# Altium PCB PPG_Proto_1.0.pcbdoc (part 2 of 2)
Units mil, origin at the board's own origin, x right, y up, seen from the top; angles counter-clockwise.
Board outline 5468.87 x 9475.06 mil, 2 copper layers (Top Layer, Bottom Layer); 64 components, 100 nets, 316 pads, 85 vias.
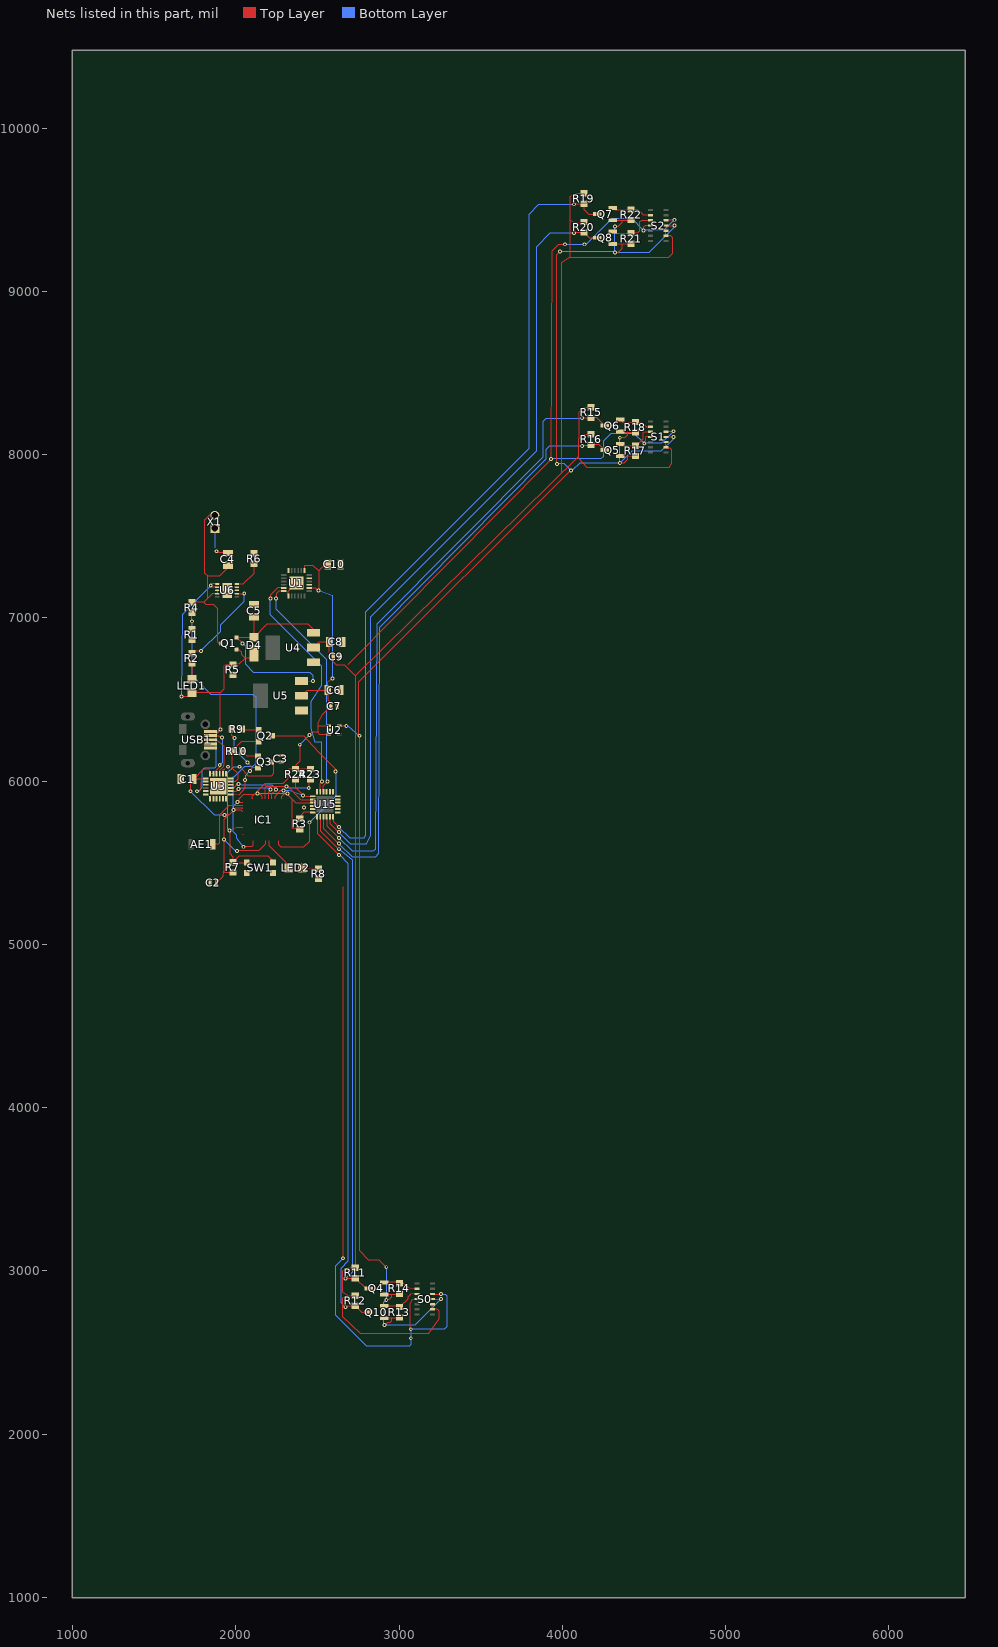
[diagram p2: the nets of this part, all layers, seen from the top]

## Via types
v1: diameter 24, hole 12, Top Layer to Bottom Layer, 85 vias

## Nets (pads, with @x,y where several pads share a name; then routed paths per layer and width w, separated by ;. In a path a pad name is that pad's centre, name@x,y a point inside that pad or via, vN(x,y) a via of type N, cw(c..) or ccw(c..) an arc to the next point about the centre after c; other vN are vias at no path point)
+1.8V: Q4.1 Q5.1 Q6.1 Q7.1 Q8.1 Q10.1 R13.2 R14.2 R17.2 R18.2 R21.2 R22.2 S0.11 S1.11 S2.11 U2.5 | length 10851
  Top Layer w5: U2.5@2634,6339.06 2676,6339.06 v1(2677,6338.06) v1@2687,6338.06 ; Q10.1@2909.24,2710.66 2996.1,2710.66 R13.2@3002,2716.57 ; Q4.1@2909.24,2855.66 2996.1,2855.66 R14.2@3002,2861.57 ; v1(2912,2668.06) 2927,2683.06 2942,2683.06 2952,2693.06 2951.4,2710.66 ; v1(2922,2823.06) 2937,2823.06 2952,2838.06 2952,2853.46 2954.21,2855.66 ; v1(2922,3023.06) 2877,3068.06 2810.1,3068.06 2757,3128.06 v1(2757,6278.06) 2752,6278.06 2752,6608.06 v1(4052,7903.06) ; S0.11@3204.24,2828.06 v1(3257,2828.06) ; v1(3967,7943.06) 3967,9223.06 v1(3987,9243.06) ; Q8.1@4309.24,9290.66 R21.2@4422,9291.57 ; Q7.1@4309.24,9435.66 R22.2@4422,9436.57 ; v1(4322,9238.06) 4342,9238.06 4366.8,9263.26 4366.8,9291.16 ; v1(4322,9398.06) 4342,9398.06 4366.34,9422.4 4366.34,9436.12 ; v1(4352,7948.06) 4377,7948.06 4397,7968.06 4397,7989.42 4398.67,7991.09 ; v1(4352,8103.06) 4382,8103.06 4397,8118.06 4397,8134.14 4399.43,8136.57 ; Q5.1@4354.24,7990.66 R17.2@4447,7991.56 ; Q6.1@4354.24,8140.66 4358.34,8136.57 R18.2@4447,8136.56 ; S1.11@4634.24,8108.06 v1(4682,8108.06) ; S2.11@4634.24,9403.06 v1(4687,9403.06)
  Bottom Layer w5: v1@2687,6338.06 v1(2757,6278.06) ; v1(2922,3023.06) v1(2922,2823.06) 2907,2808.06 2907,2673.06 v1(2912,2668.06) 3097,2668.06 v1(3257,2828.06) ; v1(3967,7943.06) 4012,7943.06 v1(4052,7903.06) 4062,7903.06 4107,7948.06 v1(4352,7948.06) ; v1(3987,9243.06) 4317,9243.06 v1(4322,9238.06) ; v1(4322,9398.06) v1(4322,9238.06) ; v1(4352,8103.06) v1(4352,7948.06) ; v1(4682,8108.06) 4682,8098.06 4607,8023.06 4427,8023.06 v1(4352,7948.06) ; v1(4687,9403.06) 4687,9393.06 4532,9238.06 v1(4322,9238.06)
+3.3V: C1.1 C2.2 C6.1 C7.2 C10.1 IC1.1 IC1.3 IC1.4 IC1.19 IC1.37 IC1.43 IC1.46 R3.1 R7.2 R23.2 R24.2 U1.8 U1.13 U2.1 U2.3 U3.5 U3.6 U3.7 U5.2 U15.21 | length 5000.7
  Top Layer w5: v1(1722,5938.06) 1722,5993.69 C1.1@1741.37,6013.06 1811.02,6013.06 U3.7@1815.23,6017.27 ; C1.1@1741.37,6013.06 1802,6073.06 1837,6073.06 1842,6068.06 1842.8,6044.86 U3.5@1862.47,6044.83 ; C2.2@1881.68,5378.06 1922,5418.06 1927,5448.06 ; v1(1932,5793.06) 1957,5793.06 ; R7.2@1982,5441.56 1933.49,5441.57 1927,5448.06 ; v1(2007,5573.06) 2142,5573.06 2181.84,5612.9 IC1.19@2181.84,5634.12 ; IC1.4@2043.06,5812.27 2032.27,5823.06 v1(1987,5823.06) ; IC1.3@2043.06,5831.96 2041.96,5833.06 1997,5833.06 v1(1987,5823.06) ; IC1.1@2043.06,5871.33 2023.73,5871.33 2017,5878.06 2017,5888.06 2047,5918.06 2112,5918.06 ; IC1.46@2103.1,5892 2102,5893.1 2102,5908.06 2117,5923.06 v1(2132,5923.06) ; IC1.43@2162.16,5892 2162,5908.06 2147,5923.06 v1(2132,5923.06) ; IC1.37@2280.27,5892 2282,5893.73 2282,5908.06 2297,5923.06 v1(2317,5923.06) ; v1@2311.32,5923.06 2366.48,5867.9 U15.21@2470.23,5867.9 ; 2346.6,5887.76 2346.6,5708.46 2390.5,5708.06 R3.1@2392,5706.57 ; v1(2392,6223.06) 2392,6123.06 2367,6098.06 R24.2@2367,6074.56 ; U5.2@2402,6523.06 2437,6558.06 C6.1@2562.63,6558.06 2562,6608.06 v1(2592,6628.06) ; U1.13@2421,7291.06 2422,7292.06 2422,7318.06 2427,7323.06 2472,7323.06 2507,7288.06 ; U1.8@2450,7183.06 2487,7183.06 2502,7168.06 v1(2507,7168.06) 2507,7288.06 ; v1(2452.25,6283.31) 2467,6298.06 2502,6298.06 ; R23.2@2457,6074.56 R24.2@2367,6074.56 ; C6.1@2562.63,6558.06 2562,6498.06 2582.3,6477.76 C7.2@2582.32,6458.06 2527,6402.74 2502,6358.06 ; C10.1@2562.63,7328.06 2547,7328.06 2507,7288.06 ; U2.3@2570,6287.06 2512,6288.06 2502,6298.06 ; U2.1@2570,6339.06 2502,6339.99 2502,6358.06 ; 1927,5448.06 v1(1927,5643.06) 1927,5763.06 v1(1987,5823.06) ; v1(2132,5923.06) 2132,5938.06 2182,5988.06 2292,5988.06 2322,6018.06 2322,6068.06 2328.49,6074.55 R24.2@2367,6074.56 ; 2502,6298.06 2502,6358.06
  Bottom Layer w5: v1(1722,5938.06) 1867,5793.06 v1(1932,5793.06) ; v1(1927,5643.06) 1997,5573.06 v1(2007,5573.06) ; v1(1987,5823.06) 1987,5848.06 v1(2012,5873.06) ; v1(2132,5923.06) v1(2317,5923.06) ; v1(2392,6223.06) v1(2452.25,6283.31) ; v1(2507,7168.06) 2592,7138.06 2592,6723.06 2592,6678.06 v1(2592,6628.06)
+5V: C8.2 C9.2 R11.2 R12.2 R15.2 R19.2 R20.2 S0.9 S0.10 S1.9 S1.10 S2.9 S2.10 U4.2 | length 11141.6
  Top Layer w5: U4.2@2477,6818.06 2512,6853.06 C8.2@2572.63,6853.06 2572.63,6787.74 C9.2@2597.32,6763.06 2597.31,6732.75 2617,6713.06 2664.2,6713.06 2732,6645.26 R11.2@2732,3019.55 2730.51,3018.06 2687,3018.06 2652,2998.06 2652,2873.06 2690.51,2849.55 ; 2730.6,6646.66 4102,7989.85 ; R12.2@2732,2849.55 2690.51,2849.55 ; S0.10@3204.24,2796.56 S0.9@3204.24,2765.07 3234.99,2765.07 3247,2753.06 3247,2708.06 3182,2618.06 2762,2618.06 2652,2723.06 2652,2833.06 2690.51,2849.55 ; 3997,7893.06 3997,9178.06 4047,9208.06 ; R20.2@4132,9424.56 4072,9423.06 4047,9438.06 ; R19.2@4132,9599.56 4130.51,9598.06 4087,9598.06 4047,9578.06 4047,9438.06 ; 4177,8124.55 4128.49,8124.55 4102,8098.06 ; R15.2@4177,8289.56 4175.51,8288.06 4132,8288.06 4102,8258.06 4102,8098.06 ; S2.9@4634.24,9340.07 4665,9340.06 4677,9328.06 4677,9233.06 4652,9208.06 4147,9208.06 4047,9208.06 ; S1.10@4634.24,8076.56 S1.9@4634.24,8045.07 4636.25,8043.06 4657,8043.06 4667,8033.06 4667,7943.06 4652,7918.06 4152,7918.06 4102,7978.06 4102,8098.06 ; S2.9@4634.24,9340.07 S2.10@4634.24,9371.56 ; 4047,9208.06 4047,9438.06
BUS_SCL: IC1.39 R24.1 U15.19 | length 382.3
  Top Layer w5: IC1.39@2240.9,5892 2242,5893.1 2242,5908.06 2277,5943.06 v1(2292,5943.06) ; R24.1@2367,6011.57 2367,5958.06 v1(2412,5913.06) 2432.8,5907.26 U15.19@2470.23,5907.27
  Bottom Layer w5: v1(2292,5943.06) 2327,5943.06 v1(2412,5913.06)
BUS_SDA: IC1.42 R23.1 U15.20 | length 591.5
  Top Layer w5: IC1.42@2181.84,5892 2182,5963.06 2187,5968.06 v1(2312,5968.06) 2317,5968.06 2397.5,5887.56 U15.20@2470.23,5887.59 ; v1(2447,5958.06) 2447,6001.56 R23.1@2457,6011.57
  Bottom Layer w5: v1(2312,5968.06) 2322,5958.06 v1(2447,5958.06)
D+: U3.3 USB1.3 | length 277.9
  Top Layer w5: USB1.3@1844.59,6253.47 1881.59,6253.47 1927,6218.06 1927,6113.06 1927,6098.06 1926.03,6092.25 1901.84,6068.06 U3.3@1901.84,6044.83
D-: U3.4 USB1.2 | length 314.7
  Top Layer w5: USB1.2@1844.59,6279.06 1845.59,6278.06 1897,6278.06 1907,6268.06 v1(1917,6268.06) ; U3.4@1882.2,6044.86 1882,6068.06 1902,6088.06 v1(1902,6098.06)
  Bottom Layer w5: v1(1902,6098.06) 1917,6113.06 v1(1917,6268.06)
DTR: Q2.2 R10.1 U3.23 | length 424.3
  Top Layer w5: U3.23@1968.77,5997.59 1996.53,5997.59 2012,6013.06 2012,6048.06 1977,6083.06 1977,6181.56 R10.1@1975.51,6183.06 2033.5,6241.06 Q2.2@2141,6241.06
GND: C1.2 C2.1 C3.1 C4.1 C5.1 C6.2 C7.1 C8.1 C9.1 C10.2 R1.1 R5.1 R6.1 R8.1 S0.4 S0.12 S1.4 S1.12 S2.4 S2.12 SW1.A SW1.A' U1.1 U1.9 U1.11 U1.18 U1.25 U2.2 U3.2 U4.1 U5.1 U6.8 U6.9 U6.11 U15.9 U15.18 U15.22 U15.23 USB1.5 X1.1 | length 9445.7
  Top Layer w5: v1(1882,7408.06) 1892.63,7397.43 C4.1@1952,7397.43 ; U3.2@1922,6044.86 1922,6073.06 1932,6073.06 1937,6078.06 ; U1.1@2323,7135.06 2323,7164.04 U1.25@2372,7213.03 ; v1(2657,3078.06) 2657,5353.06 ; 2687,6713.06 3922,7963.06 v1(3932,7973.06) 3937,9248.06 3977,9288.06 v1(4017,9288.06) ; v1@3064.2,2648.06 3064.2,2795.26 3077,2823.06 S0.4@3109.76,2828.06 ; S0.12@3204.24,2859.56 3205.74,2858.06 v1(3257,2858.06) ; v1(4497,9373.06) 4497,9393.06 4507,9403.06 S2.4@4539.76,9403.06 ; v1(4502,8068.06) 4502,8078.06 4507,8083.06 4507,8103.06 4512,8108.06 S1.4@4539.76,8108.06 ; S1.12@4634.24,8139.56 4637.74,8143.06 v1(4682,8143.06) ; S2.12@4634.24,9434.56 4637.74,9438.06 v1(4687,9438.06)
  Bottom Layer w5: 1872,7428.06 X1.1@1872,7548.66 ; v1(2657,3078.06) 2612,3033.06 2612,2728.06 2802,2538.06 3062,2538.06 3072,2548.06 v1(3072,2588.06) v1(3072,2643.06) 3277,2643.06 3292,2658.06 3292,2848.06 3282,2858.06 v1(3257,2858.06) ; v1(3932,7973.06) 4237,7973.06 4252,7988.06 4252,8083.06 4297,8128.06 4442,8128.06 v1(4502,8068.06) 4607,8068.06 v1(4682,8143.06) ; v1@4017,9293.06 v1(4017,9288.06) v1(4137,9288.06) 4147,9288.06 4302,9443.06 4427,9443.06 v1(4497,9373.06) 4622,9373.06 v1(4687,9438.06)
  other v1: 2417,5838.06 1952,6088.06
IC1_5: IC1.5
IC1_6: IC1.6
IC1_7: IC1.7
IC1_8: IC1.8
IC1_10: IC1.10
IC1_11: IC1.11
IC1_12: IC1.12
IC1_13: IC1.13
IC1_14: IC1.14
IC1_16: IC1.16
IC1_17: IC1.17
IC1_18: IC1.18
IC1_21: IC1.21
IC1_22: IC1.22
IC1_24: IC1.24
IC1_25: IC1.25
IC1_27: IC1.27
IC1_28: IC1.28
IC1_29: IC1.29
IC1_30: IC1.30
IC1_31: IC1.31
IC1_32: IC1.32
IC1_33: IC1.33
IC1_34: IC1.34
IC1_35: IC1.35
IC1_36: IC1.36
IC1_38: IC1.38
IO0: IC1.23 Q2.3 | length 1215.7
  Top Layer w5: Q2.3@2223,6278.06 2282,6278.06 2352,6278.06 2417,6278.06 2437,6253.06 2507,6178.06 2612,6073.06 v1(2612,6058.06) ; IC1.23@2260.58,5634.12 2260.58,5614.48 2277,5598.06 2417,5598.06 2452,5633.06 v1(2452,5748.06)
  Bottom Layer w5: v1(2452,5748.06) 2612,5908.06 v1(2612,6058.06)
IO13: IC1.20 LED2.1 | length 217.4
  Top Layer w5: 2201.5,5634.16 2202,5608.06 2325.7,5484.46 LED2.1@2325.7,5468.06
LNA_IN: AE1.S IC1.2 | length 382.5
  Top Layer w5: AE1.S@1858.93,5613.06 1863.93,5618.06 1897,5618.06 1902,5623.06 1902,5793.06 1960.58,5851.64 IC1.2@2043.06,5851.64
LV_SCL0: Q4.2 R14.1 S0.2 | length 219.7
  Top Layer w5: Q4.2@2909.24,2930.46 2996.09,2930.46 R14.1@3002,2924.55 3025.5,2924.56 3062,2893.06 S0.2@3109.76,2891.05 S0.2@3104.76,2891.05
LV_SCL1: Q6.2 R18.1 S1.2 | length 203.9
  Top Layer w5: Q6.2@4354.24,8215.46 4370.15,8199.56 R18.1@4447,8199.55 4448.5,8198.06 4487,8198.06 4514.01,8171.05 S1.2@4539.76,8171.05
LV_SCL2: Q7.2 R22.1 S2.2 | length 248.9
  Top Layer w5: Q7.2@4309.24,9510.46 4320.15,9499.56 R22.1@4422,9499.55 4465.5,9499.56 4499.01,9466.05 S2.2@4539.76,9466.05
LV_SDA0: Q10.2 R13.1 S0.3 | length 241.4
  Top Layer w5: Q10.2@2909.24,2785.46 2996.09,2785.46 R13.1@3002,2779.55 3003.5,2779.56 3052,2828.06 3052,2838.06 3072,2858.06 S0.3@3109.76,2859.56
LV_SDA1: Q5.2 R17.1 S1.3 | length 248.7
  Top Layer w5: Q5.2@4354.24,8065.46 4365.15,8054.56 R17.1@4447,8054.55 4453.5,8054.56 4492,8093.06 4492,8133.06 4497,8138.06 4538.26,8138.06 S1.3@4539.76,8139.56
LV_SDA2: Q8.2 R21.1 S2.3 | length 300.4
  Top Layer w5: Q8.2@4309.24,9365.46 4320.15,9354.56 R21.1@4422,9354.55 4458.5,9354.56 4472,9368.06 4472,9423.06 4482,9433.06 4538.26,9433.06 S2.3@4539.76,9434.56
null: 
Q2_1: Q2.1 R9.2 | length 103.7
  Top Layer w5: R9.2@2038.49,6318.06 2041.49,6315.06 Q2.1@2141,6315.06
Q3_1: Q3.1 R10.2 | length 109.1
  Top Layer w5: R10.2@2038.49,6183.06 2066.49,6155.06 Q3.1@2136,6155.06
R2_1: LED1.2 R2.1 | length 97.2
  Top Layer w5: LED1.2@1732,6624.41 R2.1@1732,6721.57
R2_2: R2.2
R6_2: R6.2 U6.10 | length 189.8
  Top Layer w5: U6.10@2008,7207.06 2009,7208.06 2047,7208.06 2112,7273.06 R6.2@2112,7331.56
R8_2: LED2.2 R8.2 | length 98.7
  Top Layer w5: LED2.2@2408.35,5468.06 R8.2@2507,5464.56
R16_1: R16.1
R16_2: R16.2
RESET: C3.2 IC1.9 Q3.3 R7.1 SW1.B SW1.B' | length 1480.3
  Top Layer w5: v1(2022,6088.06) 2027,6088.06 2072,6033.06 2222,6033.06 2232,6048.06 2232,6098.06 2218,6112.06 Q3.3@2218,6118.06 C3.2@2277,6118.38 ; 2043.1,5713.86 2007,5713.06 v1(1962,5698.06) 1962,5558.06 1982,5538.06 R7.1@1982,5504.55 ; SW1.B@2067,5501.05 1985.51,5501.05 R7.1@1982,5504.55 ; SW1.B'@2228.42,5501.05 2228.42,5511.64 2197,5543.06 2020.5,5543.06 R7.1@1982,5504.55
  Bottom Layer w5: v1(1962,5698.06) 1952,5708.06 1952,6053.06 1987,6088.06 v1(2022,6088.06)
RTS: Q3.2 R9.1 U3.19 | length 572.2
  Top Layer w5: U3.19@1968.8,5918.86 2022,5918.06 2057,5958.06 v1(2057,6008.06) ; R9.1@1975.51,6318.06 1975.5,6279.56 v1(1992,6263.06) ; v1(2072,6113.06) 2102,6083.06 ; v1(2087,6063.06) 2087,6068.06 2102,6083.06 ; Q3.2@2136,6081.06 2134,6083.06 2102,6083.06
  Bottom Layer w5: v1(1992,6263.06) 1992,6193.06 v1(2072,6113.06) ; v1(2057,6008.06) 2057,6033.06 v1(2087,6063.06)
RXD: IC1.40 U3.21 | length 370
  Top Layer w5: U3.21@1968.8,5958.26 1987,5958.06 2012,5983.06 v1(2017,5983.06) ; IC1.40@2221.21,5892 2221.21,5922.27 v1(2247,5948.06)
  Bottom Layer w5: v1(2017,5983.06) 2037,5978.06 2222,5978.06 v1(2247,5948.06)
S$15: 
S$17: 
S$18: 
S$21: 
S$23: 
S$2639: 
SCL0: Q4.3 R11.1 U15.2 | length 3100.9
  Top Layer w5: U15.2@2517.48,5781.29 2517.48,5697.58 v1(2632,5583.06) ; v1(2672,2953.06) 2675.51,2956.57 R11.1@2732,2956.57 2795.5,2893.06 Q4.3@2814.76,2893.06
  Bottom Layer w5: v1(2632,5583.06) 2647,5573.06 2712,5518.06 2712,2993.06 v1(2672,2953.06)
SCL1: Q6.3 R15.1 U15.4 | length 3865.7
  Top Layer w5: U15.4@2556.85,5781.29 2556.85,5728.21 v1(2632,5653.06) ; v1(4122,8223.06) 4173.49,8223.06 R15.1@4177,8226.57 4211.25,8226.56 Q6.3@4259.76,8178.06
  Bottom Layer w5: v1(2632,5653.06) 2712,5573.06 2842,5573.06 2857,5583.06 2867,6963.06 3882,7988.06 3882,8203.06 3902,8223.06 v1(4122,8223.06)
SCL2: Q7.3 R19.1 U15.6 | length 4987.2
  Top Layer w5: U15.6@2596.22,5781.29 2596.22,5753.84 v1(2632,5718.06) ; v1(4072,9533.06) 4075.51,9536.57 R19.1@4132,9536.57 4132,9503.06 4162,9473.06 Q7.3@4214.76,9473.06
  Bottom Layer w5: v1(2632,5718.06) 2697,5653.06 2787,5653.06 2797,5668.06 2797,7038.32 3797,8038.32 3797,9473.06 3857,9533.06 v1(4072,9533.06)
SCL7: U1.23 U15.17 | length 1501.2
  Top Layer w5: v1(2212,7118.06) 2212,7138.06 2257,7183.06 U1.23@2294,7183.06 ; U15.17@2517.48,5934.83 2517.48,5988.54 v1(2527,5998.06)
  Bottom Layer w5: v1(2212,7118.06) 2212,7018.06 2527,6703.06 2527,6588.06 2462,6488.06 2462,6323.06 2487,6238.06 2527,6238.06 v1(2527,5998.06)
SDA0: Q10.3 R12.1 U15.1 | length 3277.8
  Top Layer w5: U15.1@2497.79,5781.29 2497.79,5682.27 v1(2632,5548.06) ; v1(2672,2778.06) 2680.51,2786.57 R12.1@2732,2786.57 2770.5,2748.06 Q10.3@2814.76,2748.06
  Bottom Layer w5: v1(2632,5548.06) 2637,5548.06 2687,5498.06 2687,3058.06 2642,3013.06 2642,2808.06 v1(2672,2778.06)
SDA1: Q5.3 U15.3 | length 3767
  Top Layer w5: U15.3@2537.16,5781.29 2537.16,5712.9 v1(2632,5618.06) ; v1(4122,8053.06) 4168.49,8053.06 4177,8061.57 4226.25,8061.56 Q5.3@4259.76,8028.06
  Bottom Layer w5: v1(2632,5618.06) 2712,5538.06 2857,5538.06 2877,5558.06 2882,6943.06 3902,7973.06 3902,8033.06 3922,8053.06 v1(4122,8053.06)
SDA2: Q8.3 R20.1 U15.5 | length 4819.8
  Top Layer w5: U15.5@2576.53,5781.29 2576.53,5743.53 v1(2632,5688.06) ; v1(4072,9358.06) 4075.51,9361.57 R20.1@4132,9361.57 4165.5,9328.06 Q8.3@4214.76,9328.06
  Bottom Layer w5: v1(2632,5688.06) 2702,5618.06 2802,5618.06 2827,5668.06 2827,7008.06 3842,8023.06 3842,9273.06 3927,9358.06 v1(4072,9358.06)
SDA7: U1.24 U15.16 | length 1407.6
  Top Layer w5: v1(2247,7118.06) 2247,7148.06 2262,7163.06 2293,7163.06 U1.24@2294,7164.06 ; U15.16@2537.16,5934.83 2537.16,5973.22 v1(2562,5998.06)
  Bottom Layer w5: v1(2247,7118.06) 2247,7053.06 2557,6743.06 2557,6003.06 v1(2562,5998.06)
STAT: U6.7 | length 564.4
  Top Layer w5: 1732,6784.55 1745.51,6798.06 v1(1787,6798.06) ; U6.7@2008,7148.06 v1(2052,7148.06)
  Bottom Layer w5: v1(1787,6798.06) 1907,6918.06 1907,6958.06 2052,7103.06 v1(2052,7148.06)
TXD: IC1.41 U3.20 | length 324.1
  Top Layer w5: U3.20@1968.77,5938.53 2002.47,5938.53 v1(2017,5953.06) ; IC1.41@2201.53,5892 2202,5933.06 v1(2212,5948.06)
  Bottom Layer w5: v1(2017,5953.06) 2032,5958.06 2037,5958.06 2196.3,5958.06 v1(2212,5948.06) 2207,5953.06 v1@2207,5958.06
U3_1: U3.1
U3_9: U3.9
U3_11: U3.11
U3_12: U3.12
U3_13: U3.13
U3_14: U3.14
U3_15: U3.15
U3_16: U3.16
U3_17: U3.17
U3_18: U3.18
U3_22: U3.22
U3_24: U3.24
U3_25: U3.25
U15_7: U15.7
U15_8: U15.8
U15_10: U15.10
U15_11: U15.11
U15_12: U15.12
U15_13: U15.13
U15_14: U15.14
U15_15: U15.15
U15_24: R3.2 U15.24 | length 102.1
  Top Layer w5: R3.2@2392,5769.56 2392,5783.06 2417,5808.06 U15.24@2470.2,5808.86
USB1_4: USB1.4
VBAT: C4.2 Q1.3 R4.2 U6.3 U6.4 X1.2 | length 1252.2
  Top Layer w5: R4.2@1732,7094.56 1803.49,7094.55 ; 1825.23,7116.11 1825.23,7259.45 ; X1.2@1872,7627.46 1836.4,7627.46 1807,7598.06 1807,7277.69 1827,7257.69 1902,7258.06 1952,7308.06 C4.2@1952,7318.69 ; U6.3@1886,7168.06 1886,7148.06 1857,7148.06 1803.49,7094.55 ; Q1.3@1909.76,6843.06 1897.01,6843.06 1887,6853.06 1887,7058.06 1862,7083.06 1814.98,7083.06 1803.49,7094.55
VBAT_REC: C5.2 D4.2 Q1.2 U4.3 U5.3 | length 1395.7
  Top Layer w5: Q1.2@2004.24,6880.45 v1(2042,6843.06) ; Q1.2@2004.24,6880.45 2006.07,6882.27 D4.2@2111.95,6882.27 2192.74,6963.06 2442,6963.06 2477,6928.06 U4.3@2477,6908.61 ; D4.2@2111.95,6882.27 C5.2@2112,7003.69 ; U5.3@2402,6613.61 v1(2472,6613.06)
  Bottom Layer w5: v1(2042,6843.06) 2057,6828.06 2057,6718.06 2107,6668.06 2452,6668.06 2472,6648.06 v1(2472,6613.06)
VBAT_SENSE: IC1.15 R1.2 R4.1 | length 2000.3
  Top Layer w5: R1.2@1732,6929.56 v1(1732,6979.07) R4.1@1732,7031.57 ; 2041.64,5673.06 2043.06,5674.48 ; v1(2047,5598.06) 2097,5598.06 2103.1,5604.16 IC1.15@2103.1,5634.12
  Bottom Layer w5: v1(1732,6979.07) 1732,6648.06 1847,6533.06 2102,6533.06 2122,6515.65 ; v1(2047,5598.06) 2032,5618.06 2002,5653.06 2002,5673.06 1982,5693.06 1982,6023.06 1987,6023.06 2052,6088.06 2102,6088.06 2122,6108.06 2122,6516.06
VBUS: D4.1 LED1.1 Q1.1 R5.2 U3.8 U6.1 U6.2 USB1.1 | length 2431.2
  Top Layer w5: v1(1667,6518.06) 1708.35,6518.06 LED1.1@1732,6541.71 1905.65,6541.71 ; v1(1762,5938.06) 1772,5938.06 1787,5953.06 1787,5993.06 1792,5998.06 U3.8@1815.23,5997.59 ; USB1.1@1844.59,6304.65 1846.18,6303.06 1892,6303.06 v1(1905.65,6316.71) 1905.65,6541.71 ; U6.2@1886,7188.06 1857,7188.06 v1(1847,7198.06) 1857,7208.06 1885,7208.06 U6.1@1886,7207.06 ; Q1.1@2004.24,6805.65 2019.4,6805.65 2037,6788.06 2037,6773.06 2057,6753.06 ; D4.1@2111.95,6783.85 2081.17,6753.06 2057,6753.06 ; 1905.65,6541.71 1927,6563.06 1927,6703.06 1937,6713.06 1980.51,6713.06 R5.2@1982,6714.56 2018.49,6714.55 2057,6753.06
  Bottom Layer w5: v1(1667,6518.06) 1672,7018.06 v1(1847,7198.06) ; v1(1762,5938.06) 1772,5938.06 1792,5958.06 1792,6063.06 1807,6078.06 1867,6078.06 1877,6088.06 1877,6288.06 v1(1905.65,6316.71)
pads on no net: AE1.G IC1.26 IC1.44 IC1.45 IC1.47 IC1.48 IC1.EXP S0.1 S0.5 S0.6 S0.7 S0.8 S0.13 S0.14 S1.1 S1.5 S1.6 S1.7 S1.8 S1.13 S1.14 S2.1 S2.5 S2.6 S2.7 S2.8 S2.13 S2.14 U1.2 U1.3 U1.4 U1.5 U1.6 U1.7 U1.10 U1.12 U1.14 U1.15 U1.16 U1.17 U1.19 U1.20 U1.21 U1.22 U2.4 U3.10 U4.4 U5.4 U6.5 U6.6 U15.25 USB1.0

## Polygon pours and split planes (outlines as drawn)
GND on Bottom Layer (solid): 1624.5,5345.56 2694.5,5345.56 2694.5,7450.56 1624.5,7450.56 1624.5,5805.56 1894.5,5805.56 1894.5,5435.56 1624.5,5435.56 1624.5,5345.56
GND on Top Layer (solid): 2692,5338.06 1622,5338.06 1622,5428.06 1892,5428.06 1892,5798.06 1622,5798.06 1622,7443.06 2692,7443.06 2692,5338.06

## Silkscreen, mask and mechanical layers (free items; w line width, h text height)
Top Overlay:
  text "PPG_PROTO_V1.0" at 2137,7780.56 h45